# EAGLE board Jalousie_neueGS_REGCR_einlagig_AKL073 (EAGLE 5.00)
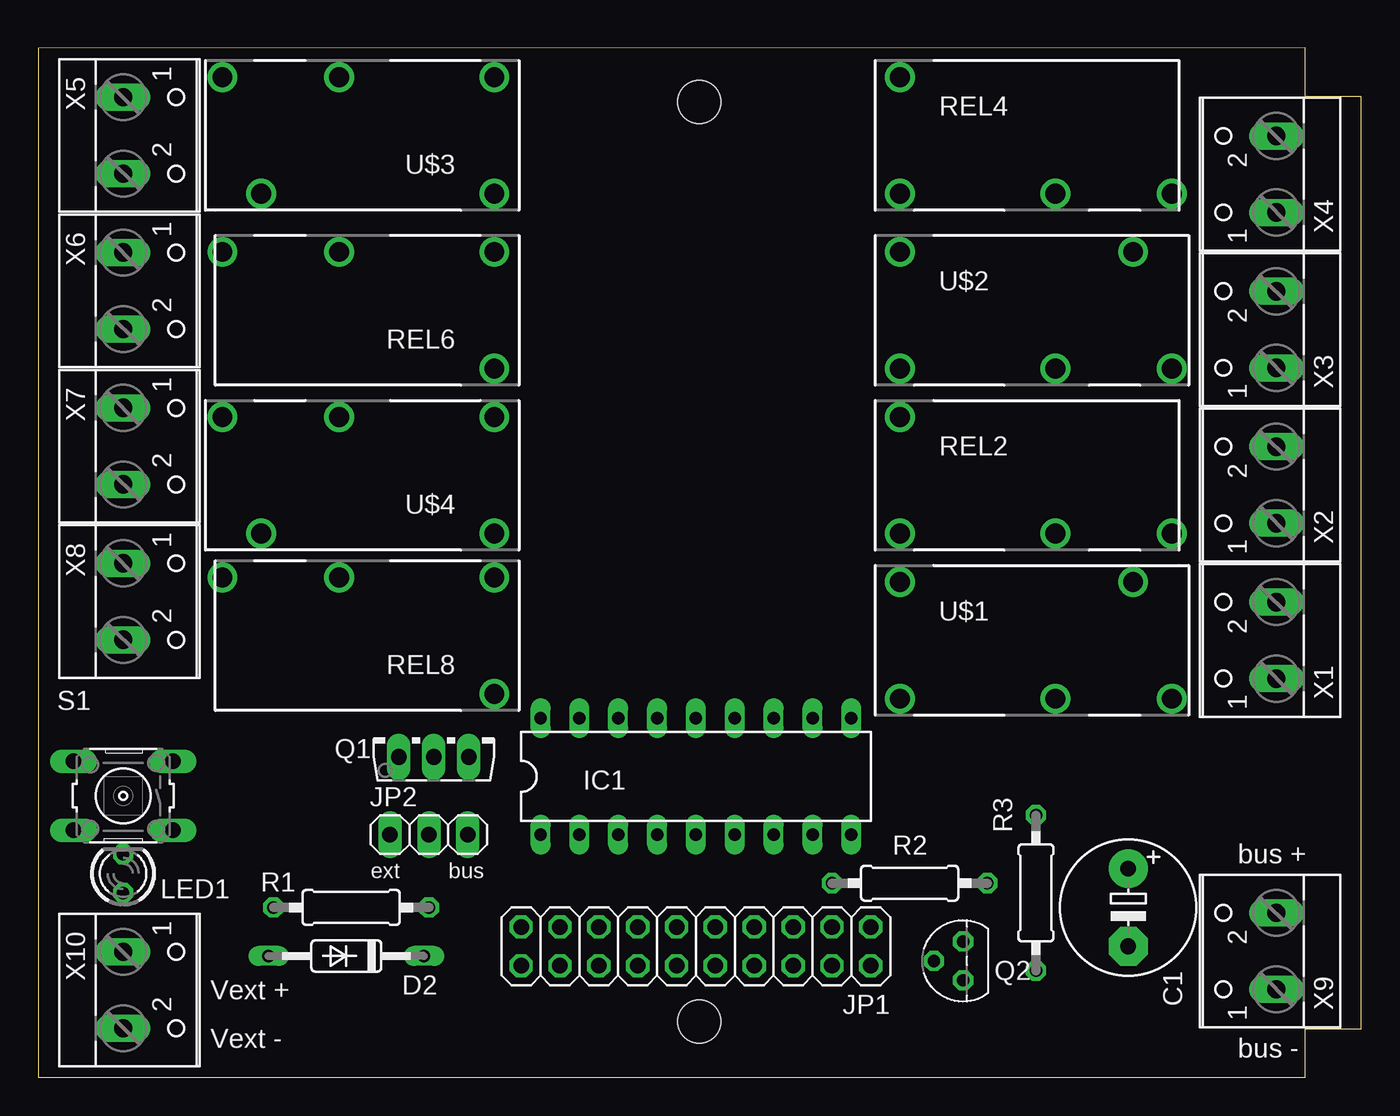
[diagram p0: board, top side]
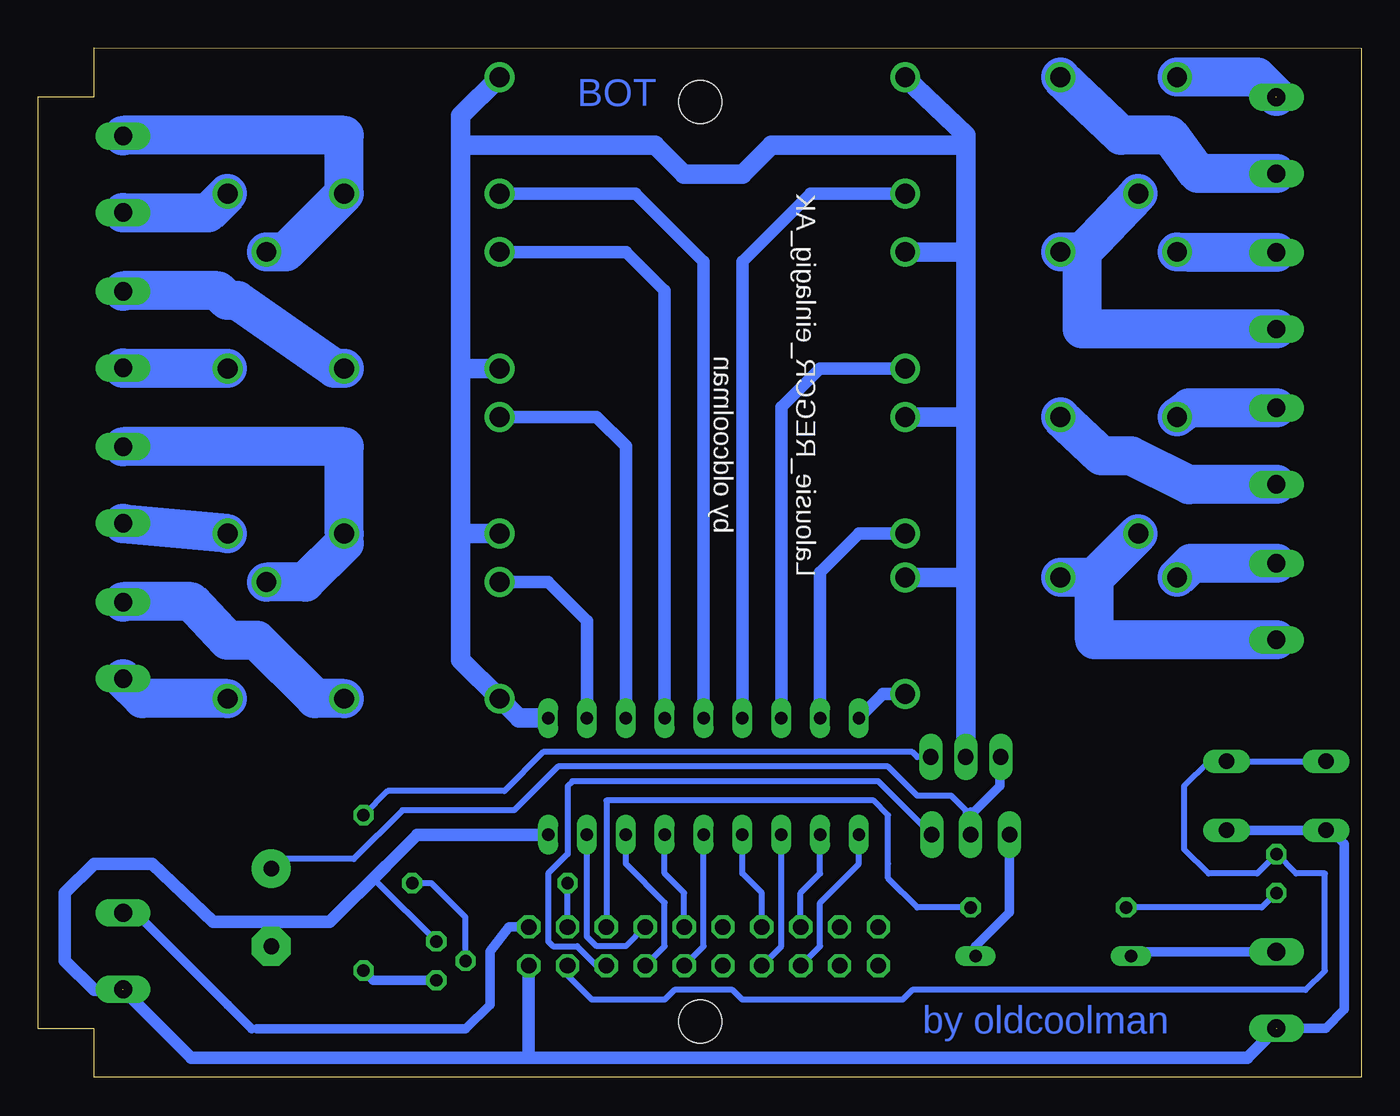
[diagram p1: board, bottom side, seen from below]

Size 86.49 x 67.31 mm. Coordinates in mm from the lower left corner, seen from the top.
Outline: 0,0.01 82.85,0 82.85,3.18 86.49,3.18 86.49,64.13 82.85,64.13 82.85,67.31 0,67.31 0,0.01
Copper layers (1*16): Top 0.035mm / dielectric 1.5mm / Bottom 0.035mm
Design rules "default": minimum track width 10mil, minimum drill 24mil, track to track 16mil, track to pad 12mil, pad to pad 16mil, via to via 16mil, smd to smd 8mil, copper to edge 20mil, drill to drill 10mil, minimum pad ring 10mil, minimum via ring 8mil, stop-mask expansion 4mil, vias tented up to drill 0mil, thermal gap 10mil
Holes 2.8 mm at 43.22,3.66 43.22,63.77

## Footprints (pad centres in the part's own frame; a part is rotated, then mirrored left to right if it is on the bottom)
E5-8,5 = drill 1.016 pad 2.54 round: + -2.54,0 | drill 1.016 pad 2.54 octagon: - 2.54,0
DO35-10 = drill 0.813 long: A 5.08,0; C -5.08,0
DIL18 = drill 0.813 long: 1 -10.16,-3.81; 2 -7.62,-3.81; 3 -5.08,-3.81; 4 -2.54,-3.81; 5 0,-3.81; 6 2.54,-3.81; 7 5.08,-3.81; 8 7.62,-3.81; 9 10.16,-3.81; 10 10.16,3.81; 11 7.62,3.81; 12 5.08,3.81; 13 2.54,3.81; 14 0,3.81; 15 -2.54,3.81; 16 -5.08,3.81; 17 -7.62,3.81; 18 -10.16,3.81
2X10 = drill 1.016 octagon: 1 -11.43,-1.27; 2 -11.43,1.27; 3 -8.89,-1.27; 4 -8.89,1.27; 5 -6.35,-1.27; 6 -6.35,1.27; 7 -3.81,-1.27; 8 -3.81,1.27; 9 -1.27,-1.27; 10 -1.27,1.27; 11 1.27,-1.27; 12 1.27,1.27; 13 3.81,-1.27; 14 3.81,1.27; 15 6.35,-1.27; 16 6.35,1.27; 17 8.89,-1.27; 18 8.89,1.27; 19 11.43,-1.27; 20 11.43,1.27
1X03 = drill 1.016 long: 1 -2.54,0; 2 0,0; 3 2.54,0
LED3MM = drill 0.813 octagon: A -1.27,0; K 1.27,0
TO126AV = drill 1.016 long: B 2.286,-1.27; C 0,-1.27; E -2.286,-1.27
TO92 = drill 0.813 octagon: 1 1.27,0; 2 0,1.905; 3 -1.27,0
0207/10@1 = drill 0.813 octagon: 1 -5.08,0; 2 5.08,0
RE-SCHRACK = drill 1.3 round: 11 8.89,-3.81; 14 1.27,-3.81; A1 -8.89,-3.81; A2 -8.89,3.81
B3F-10XX = drill 1.016 long: 1 -3.251,2.261; 2 3.251,2.261; 3 -3.251,-2.261; 4 3.251,-2.261
G5Q_1_EU = drill 1.3 round: 11 1.27,-3.81; 12 6.35,3.81; 14 8.89,-3.81; A1 -8.89,-3.81; A2 -8.89,3.81
W237-102 = drill 1.194 long: 1 -2.5,-1.27; 2 2.5,-1.27

## Placement (x,y rotation side)
C1  35V 10µF  [E5-8,5]  71.26,11.11 270 top
D2  1N4148  [DO35-10]  20.14,7.94 180 top
IC1  ULN2803  [DIL18]  43,19.69 0 top
JP1  [2X10]  43,8.57 180 top
JP2  [1X03]  25.54,15.88 0 top
LED1  rot  [LED3MM]  5.55,13.33 90 top
Q1  BD138  [TO126AV]  25.86,22.23 0 top
Q2  BC547  [TO92]  60.46,7.62 90 top
R1  1k  [0207/10@1]  20.46,11.11 180 top
R2  10k  [0207/10@1]  56.97,12.7 0 top
R3  10k  [0207/10@1]  65.22,12.06 90 top
REL2  G5Q-1A  [RE-SCHRACK]  65.22,39.37 0 top
REL4  G5Q-1A  [RE-SCHRACK]  65.22,61.59 0 top
REL6  G5Q-1A  [RE-SCHRACK]  20.93,50.16 180 top
REL8  G5Q-1A  [RE-SCHRACK]  20.93,28.89 180 top
S1  Programmiertaster  [B3F-10XX]  5.55,18.42 180 top
U$1  RE03U  [G5Q_1_EU]  65.22,28.58 0 top
U$2  RE03U  [G5Q_1_EU]  65.22,50.16 0 top
U$3  RE03U  [G5Q_1_EU]  20.93,61.59 180 top
U$4  RE03U  [G5Q_1_EU]  20.93,39.37 180 top
X1  [W237-102]  79.67,28.58 90 top
X2  [W237-102]  79.67,38.73 90 top
X3  [W237-102]  79.67,48.89 90 top
X4  [W237-102]  79.67,59.05 90 top
X5  [W237-102]  6.82,61.59 270 top
X6  [W237-102]  6.82,51.43 270 top
X7  [W237-102]  6.82,41.27 270 top
X8  [W237-102]  6.82,31.12 270 top
X9  [W237-102]  79.67,8.26 90 top
X10  [W237-102]  6.82,5.71 270 top

## Library data of the parts
C1 R1-R3 = rcl
D2 = diode
IC1 = uln-udn
JP1 JP2 = pinhead
LED1 = led
Q1 = transistor-power
Q2 = transistor-npn
REL2 REL4 REL6 REL8 = relay
S1 = switch-omron
U$1-U$4 = freebus_relay
X1-X10 = con-wago-500

## Nets
EXTDC: D2.C JP2.1
GND: C1.- IC1.9 JP1.2 Q2.1 S1.1 S1.2 X9.1 X10.2
IO1: IC1.1 JP1.16
IO2: IC1.2 JP1.15
IO3: IC1.3 JP1.14
IO4: IC1.4 JP1.13
IO5: IC1.5 JP1.10
IO6: IC1.6 JP1.9
IO7: IC1.7 JP1.8
IO8: IC1.8 JP1.7
N$1: REL4.11 X4.1
N$2: REL4.14 U$2.12 X4.2
N$3: U$2.14 X3.1
N$4: U$2.11 X3.2
N$5: REL2.11 X2.1
N$6: REL2.14 U$1.12 X2.2
N$7: U$1.14 X1.1
N$8: U$1.11 X1.2
N$9: REL6.14 U$3.12 X6.2
N$10: REL6.11 X6.1
N$11: U$4.11 X7.2
N$12: REL8.11 X8.1
N$13: U$3.11 X5.2
N$14: U$3.14 X5.1
N$15: U$4.14 X7.1
N$16: REL8.14 U$4.12 X8.2
N$17: D2.A X10.1
N$19: IC1.10 Q1.C REL2.A1 REL4.A2 REL6.A1 REL8.A1 U$1.A1 U$2.A1 U$3.A1 U$4.A1
N$20: JP1.1 X9.2
N$24: JP1.5 R1.1
N$27: JP1.4 LED1.K S1.3 S1.4
N$28: LED1.A R1.2
N$33: JP1.3 R2.1
N$37: Q1.B R3.2
N$38: Q2.3 R3.1
N$39: Q2.2 R2.2
R1: IC1.14 REL4.A1
R2: IC1.13 U$2.A2
R3: IC1.12 REL2.A2
R4: IC1.11 U$1.A2
R5: IC1.15 U$3.A2
R6: IC1.16 REL6.A2
R7: IC1.17 U$4.A2
R8: IC1.18 REL8.A2
VDD: C1.+ JP2.2 Q1.E
VERSORGUNG: JP1.6 JP2.3

## Tracks (layer width: path | path; a pad name or v marks a point on that pad's centre or on a via)
EXTDC
  Bottom 0.61: D2.C 25.22,8.57 23,10.79 JP2.1
GND  (2 unrouted)
  Bottom 0.406: 63.8,13.81 64.43,12.86 Q2.1 | 71.26,10.16 C1.-
  Bottom 0.61: X10.2 2.33,3.21 1.1,4.45 1.1,15.25 2.04,16.19 2.08,16.15 S1.2 8.99,16.15 | 8.99,16.15 S1.1 | 8.99,16.15 9.03,16.19
  Bottom 0.813: 54.43,1.27 7.46,1.27 5.55,3.17 | 54.43,1.27 76.5,1.27 80.94,5.71 82.85,5.71 84.75,7.62 84.75,12.06 82.85,13.97 79.04,13.97 75.07,10.16 71.26,10.16 67.45,10.16 63.8,13.81 61.73,15.88 IC1.9 | 54.43,1.27 JP1.2
IO1
  Bottom 0.406: IC1.1 32.84,13.97 35.38,11.43 35.38,8.57 JP1.16
IO2
  Bottom 0.406: JP1.15 36.65,12.06 35.38,13.33 IC1.2
IO3
  Bottom 0.406: IC1.3 37.92,8.57 JP1.14
IO4
  Bottom 0.406: JP1.13 39.19,12.06 40.46,13.33 IC1.4
IO5
  Bottom 0.406: IC1.5 43,8.57 JP1.10
IO6
  Bottom 0.406: JP1.9 44.27,12.06 45.54,13.33 IC1.6
IO7
  Bottom 0.406: IC1.7 48.08,13.97 45.54,11.43 45.54,8.57 JP1.8
IO8
  Bottom 0.406: JP1.7 48.08,8.57 49.98,8.57 50.62,9.21 IC1.8
N$1
  Bottom 2.54: X4.1 80.94,56.52 75.38,56.52 REL4.11
N$2
  Bottom 2.54: X4.2 80.94,61.59 66.49,61.59 REL4.14 70.3,53.98 U$2.12
N$3
  Bottom 2.54: X3.1 80.94,46.35 U$2.14
N$4
  Bottom 2.54: U$2.11 67.13,46.35 73.48,50.8 74.11,50.8 74.75,51.43 80.94,51.43 X3.2
N$5
  Bottom 2.54: X2.1 80.94,36.2 REL2.11
N$6
  Bottom 1.27: REL2.14 66.49,34.92
  Bottom 2.54: U$1.12 69.03,32.38 66.49,34.92 | X2.2 66.49,41.23 REL2.14
N$7
  Bottom 2.54: X1.1 80.94,26.04 79.67,24.77 U$1.14
N$8
  Bottom 2.54: U$1.11 68.4,24.77 72.21,28.58 74.11,28.58 76.5,31.12 80.94,31.12 X1.2
N$9
  Bottom 2.54: X6.2 18.23,48.93 18.23,53.98 | 18.23,53.98 REL6.14 | 18.23,53.98 U$3.12
N$10
  Bottom 2.54: X6.1 11.21,53.93 REL6.11
N$11
  Bottom 2.54: X7.2 11.25,38.77 11.25,38.73 15.06,40.64 16.96,40.64 U$4.11
N$12
  Bottom 2.54: X8.1 11.12,33.61 REL8.11
N$13
  Bottom 2.54: X5.2 10.67,59.09 12.52,61.59 15.7,61.59 U$3.11
N$14  (1 unrouted)
  Bottom 2.54: 5.55,64.14 6.82,65.41 U$3.14
N$15
  Bottom 2.54: X7.1 11.25,43.77 U$4.14
N$16
  Bottom 2.54: 17.44,32.7 U$4.12 | X8.2 17.44,28.62 17.44,32.7 | 17.44,32.7 REL8.14
N$17
  Bottom 0.406: 14.38,8.21 12.8,8.21 D2.A
  Bottom 0.61: X10.1 14.38,8.21
N$18  (via drill 0.6)
  other vias: 43.22,63.77
N$19
  Bottom 1.27: IC1.10 55.06,23.5 U$1.A1 58.88,27.31 58.88,35.56 | 58.88,46.35 58.88,35.56 | 58.88,35.56 REL2.A1 | 58.88,46.35 U$2.A1 | 58.88,60.96 58.88,46.35 | 58.88,60.96 58.88,62.86 REL4.A2 | Q1.C 25.86,32.7 | 25.86,32.7 REL8.A1 | 25.86,43.18 U$4.A1 | 25.86,32.7 25.86,43.18 | REL6.A1 25.86,53.98 25.86,53.34 | 25.86,43.18 25.86,53.34 | U$3.A1 25.86,61.59 25.86,60.96 | 25.86,53.34 25.86,60.96 | 25.86,60.96 38.55,60.96 40.46,59.05 44.27,59.05 46.17,60.96 58.88,60.96
N$20
  Bottom 0.406: 72.21,3.17 72.53,3.17 | 80.78,10.79 80.82,10.75 X9.2
  Bottom 0.61: 72.21,3.17 58.56,3.17 56.97,4.76 56.97,8.26 55.7,9.84 JP1.1 | 72.53,3.17 74.11,4.76 80.15,10.79 80.78,10.79
N$21  (via drill 0.6)
  other vias: 43.22,3.67
N$24
  Bottom 0.406: JP1.5 49.35,18.1 31.89,18.1 30.93,17.15 30.93,13.97 30.93,13.02 29.03,11.11 R1.1
N$27
  Bottom 0.406: JP1.4 51.89,6.67 50.94,5.71 50.3,5.08 45.54,5.08 44.91,5.71 41.09,5.71 40.46,5.08 29.98,5.08 29.35,5.71 3.65,5.71 2.38,6.98 2.38,13.33 4.27,13.33 5.54,14.61 LED1.K 5.55,14.59 6.81,13.33 9.98,13.33 11.57,14.92 11.57,19.05 9.98,20.64 9.03,20.64 8.99,20.68 S1.3 2.4,20.68 2.36,20.64 2.32,20.68 S1.4
N$28
  Bottom 0.406: LED1.A 6.5,11.11 R1.2
N$33
  Bottom 0.406: JP1.3 R2.1
N$37
  Bottom 0.406: R3.2 63.64,18.73 56.02,18.73 53.48,21.27 29.35,21.27 29.03,20.96 Q1.B
N$38
  Bottom 0.61: Q2.3 64.59,6.35 R3.1
N$39
  Bottom 0.406: Q2.2 58.56,10.48 60.78,12.7 R2.2
R1
  Bottom 0.813: IC1.14 43,53.34 47.45,57.78 REL4.A1
R2
  Bottom 0.813: IC1.13 45.54,51.43 48.08,53.98 U$2.A2
R3
  Bottom 0.813: IC1.12 48.08,41.27 49.98,43.18 REL2.A2
R4
  Bottom 0.813: IC1.11 50.62,29.85 53.16,32.38 U$1.A2
R5
  Bottom 0.813: IC1.15 40.46,53.34 36.02,57.78 U$3.A2
R6
  Bottom 0.813: IC1.16 37.92,43.81 35.38,46.35 REL6.A2
R7
  Bottom 0.813: IC1.17 35.38,33.02 32.84,35.56 U$4.A2
R8
  Bottom 0.813: IC1.18 31.26,25.08 REL8.A2
VDD
  Bottom 0.406: 25.54,17.46 | 25.54,17.46 25.38,17.3 | 25.54,17.46 JP2.2 25.86,16.19 25.86,17.46 26.81,18.42 29.03,18.42 30.93,20.32 52.52,20.32 55.38,17.46 62.69,17.46 65.86,14.29 70.62,14.29 C1.+
  Bottom 0.61: 25.54,17.15 25.38,17.3 23.63,19.05 23.63,20.96
  Bottom 0.813: 23.63,20.96 Q1.E
VERSORGUNG
  Bottom 0.406: JP1.6 49.98,7.3 51.26,8.57 52.84,8.57 53.16,8.89 53.16,13.33 51.89,14.61 51.89,19.05 51.57,19.37 31.57,19.37 JP2.3

## Text on the board
Bottom: BOT | by oldcoolman
tPlace: bus + | ext | bus | Vext + | Vext - | bus -
bPlace: Lalousie_REGCR_einlagig_AK | by oldcoolman